# Altium PCB carte_pami26.PcbDoc
Units mm, origin at the board's own origin, x right, y up, seen from the top; angles counter-clockwise.
Board outline 78.9 x 53.9 mm, 2 copper layers (Top Layer, Bottom Layer); 38 components, 32 nets, 130 pads, 0 vias.
Unrouted connection lines stored in the file: 82.
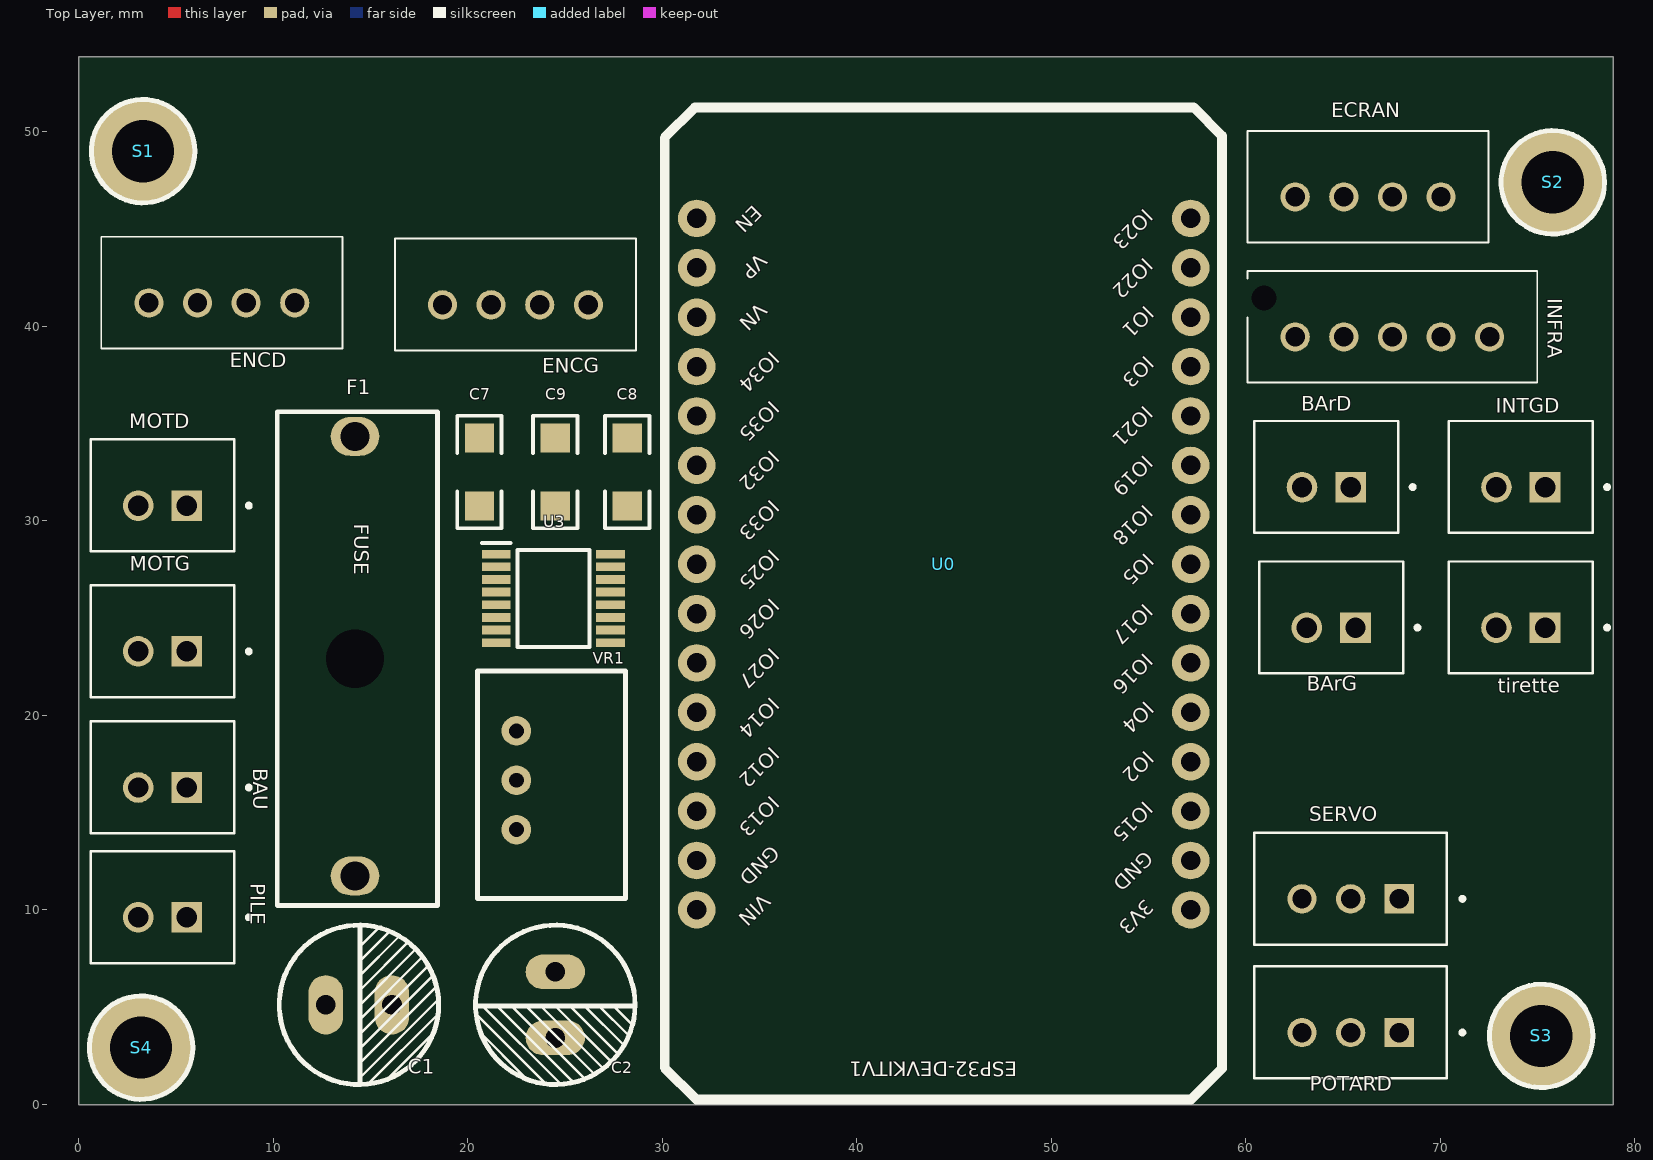
[diagram p0: Top Layer view]
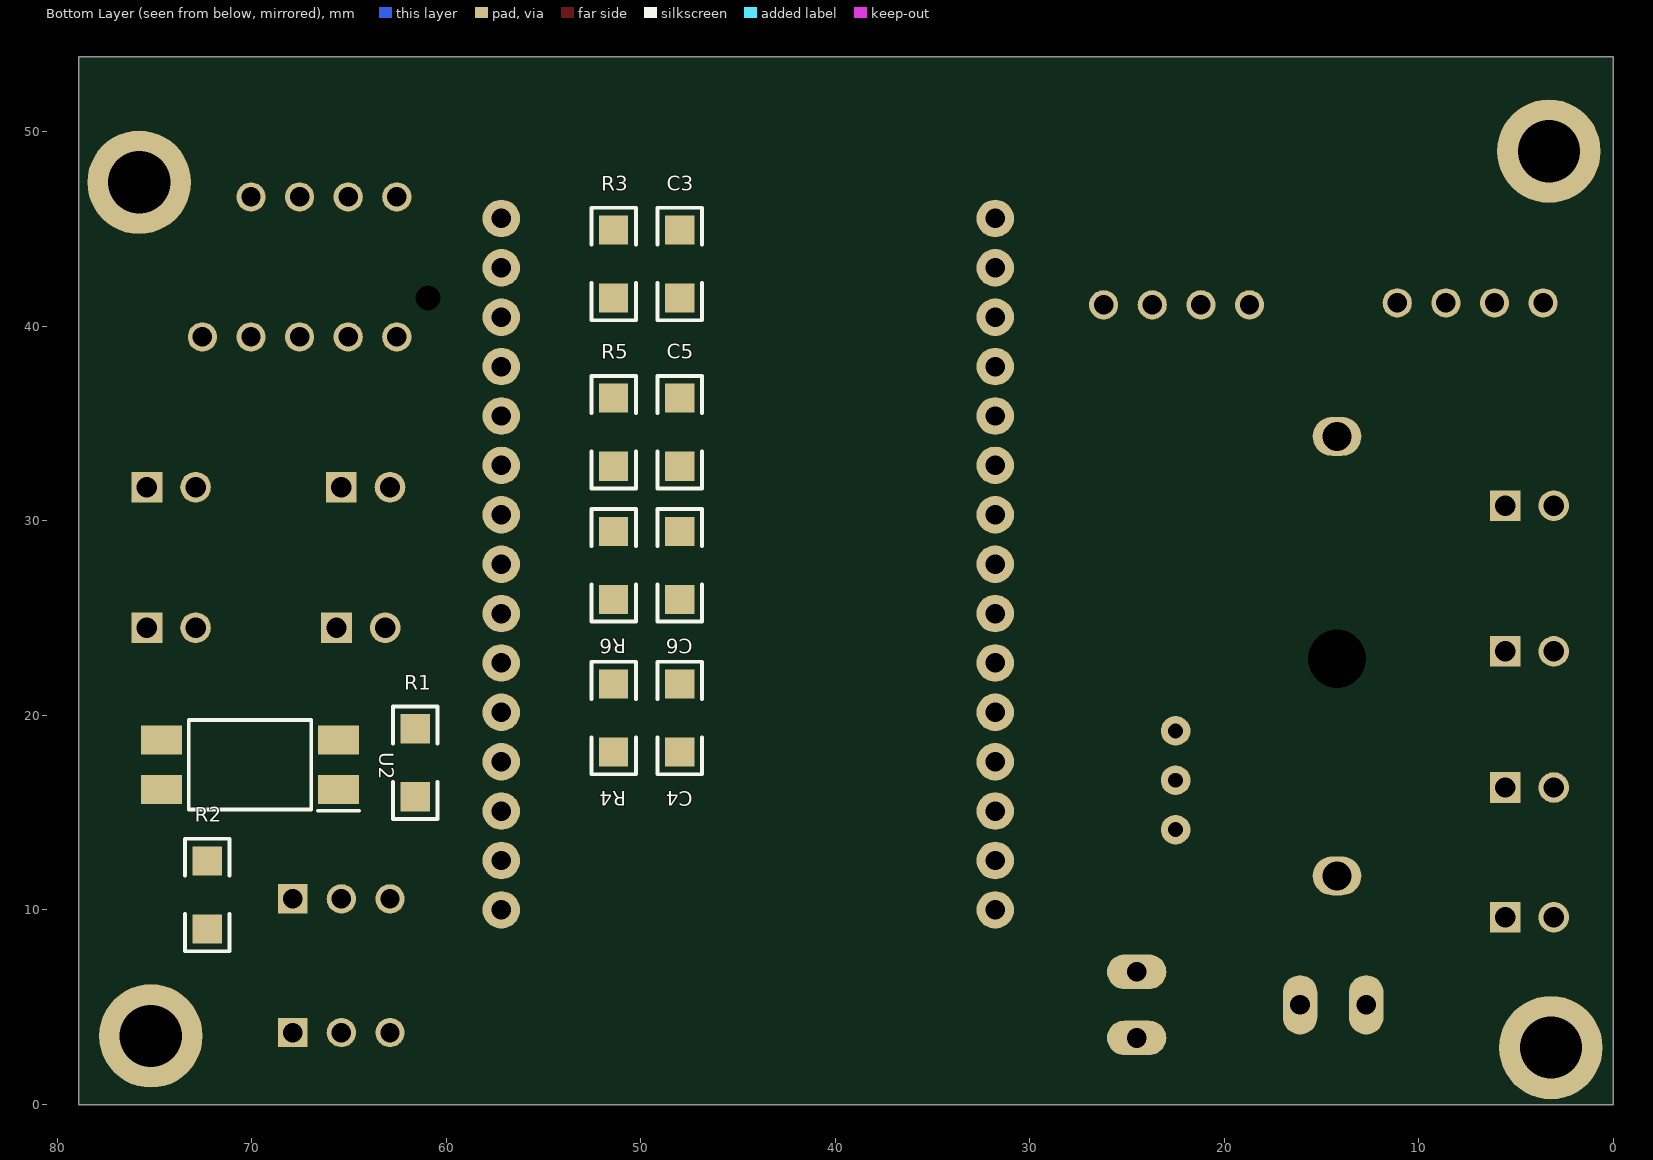
[diagram p1: Bottom Layer view, seen from below]

## Layer stack, top to bottom
Top Solder: solder mask 0.0102, Solder Resist, Dk 3.5
Top Layer: signal copper 0.0356
Dielectric 1: dielectric 0.32, FR-4, Dk 4.8
Bottom Layer: signal copper 0.0356
Bottom Solder: solder mask 0.0102, Solder Resist, Dk 3.5

## Board outline
0,-0.05 78.9,-0.05 78.9,53.85 0,53.85

## Design rules (kind name [scope] priority, off if disabled: settings)
Clearance [All] p1: gap=0.254 ignorepadtopadclearanceinfootprint=FALSE
PolygonConnect [All] p1: connectstyle=Relief reliefconductorwidth=0.254 reliefentries=4 polygonreliefangle="90 Angle" airgapwidth=0.254
RoutingVias [All] p1: holewidth=0.711 width=1.27 viastyle="Through Hole" minholewidth=0.711 minwidth=1.27 maxholewidth=0.711 maxwidth=1.27
SolderMaskExpansion [All] p1: expansion=0 istentingtop=FALSE
SupplyNets "Schematic Supply Nets_3" [InNet('3.3V')] p1: voltage=0.000
SupplyNets "Schematic Supply Nets_2" [InNet('5V')] p2: voltage=0.000
SupplyNets "Schematic Supply Nets_1" [InNet('GND')] p3: voltage=0.000
SupplyNets "Schematic Supply Nets" [InNet('V_Bat')] p4: voltage=0.000
Width [All] p1: maxlimit=0.254 minlimit=0.254 preferedwidth=0.254
30 further rules are at their usual default settings.

## Components (designator, comment, footprint, x,y, rotation, side; value= is the part's Value field where it differs from the comment)
BArD "Header 2H" JST_B2B-XH-A_(LF)(SN) 64.15,32.25 r0 top
BArG "Header 2H" JST_B2B-XH-A_(LF)(SN) 64.4,25.025 r0 top
BAU "Header 2H" JST_B2B-XH-A_(LF)(SN) 4.3,16.8 r0 top
C1 "35V" Condensateur 12.7,5.1 r0 top value=100uF
C2 "35V" Condensateur 24.5,6.8 r270 top value=100nF
C3 "Cap" "Capacitor 1206" 48,43.2 r90 bottom value=100nF
C4 "Cap" "Capacitor 1206" 48,19.85 r90 bottom value=100nF
C5 "Cap" "Capacitor 1206" 48,34.55 r270 bottom value=100nF
C6 "Cap" "Capacitor 1206" 48,27.7 r90 bottom value=100nF
C7 "Cap" "Capacitor 1206" 20.6,32.5 r90 top value=10uF
C8 "Cap" "Capacitor 1206" 28.2,32.5 r270 top value=10nF
C9 "Cap" "Capacitor 1206" 24.5,32.5 r270 top value=2.2uF
ECRAN "Header 4" B4BXHALFSN 62.55,46.65 r0 top
ENCD "Header 4" B4BXHALFSN 3.6,41.2 r0 top
ENCG "Header 4" B4BXHALFSN 18.7,41.1 r0 top
F1 "2A max" Fuse 14.2,34.33 r270 top
INFRA "Header 5H" B5BXHAMLFSN 62.55,39.45 r0 top
INTGD "Header 2H" JST_B2B-XH-A_(LF)(SN) 74.15,32.25 r0 top
MOTD "Header 2H" JST_B2B-XH-A_(LF)(SN) 4.3,31.3 r0 top
MOTG "Header 2H" JST_B2B-XH-A_(LF)(SN) 4.3,23.8 r0 top
PILE "Header 2H" JST_B2B-XH-A_(LF)(SN) 4.3,10.125 r0 top
POTARD "Header 3" JST_B3B-XH-A(LF)(SN) 65.4,4.2 r0 top
R1 "Res2" "Resistor 1206" 61.6,17.55 r270 bottom value=150
R2 "Res2" "Resistor 1206" 72.3,10.75 r90 bottom value=10K
R3 "Res2" "Resistor 1206" 51.4,43.2 r90 bottom value=10K
R4 "Res2" "Resistor 1206" 51.4,19.85 r90 bottom value=10K
R5 "Res2" "Resistor 1206" 51.4,34.55 r270 bottom value=10K
R6 "Res2" "Resistor 1206" 51.4,27.7 r90 bottom value=10K
S1 "Screw M3" "Screw M3" 3.3,49 r90 top
S2 "Screw M3" "Screw M3" 75.8,47.4 r90 top
S3 "Screw M3" "Screw M3" 75.2,3.5 r90 top
S4 "Screw M3" "Screw M3" 3.2,2.9 r90 top
SERVO "Header 3" JST_B3B-XH-A(LF)(SN) 65.4,11.075 r0 top
tirette "Header 2H" JST_B2B-XH-A_(LF)(SN) 74.15,25.025 r0 top
U0 "ESP32-DEVKITC-32D" MODULE_ESP32-DEVKITV1 44.476,24.983 r180 top
U2 "FOD817S" SOP254P1016X385-4N 70.1,17.45 r0 bottom
U3 "DRV8833PWPR" SOP65P640X120-16N 24.4,26 r0 top
VR1 "TSR 1-2450" TRS 22.5,19.19 r90 top

## Footprints (in the part's own frame and the unit in brackets; to place one, negate y for a bottom-side part, rotate by r counter-clockwise, add the part's x,y. Pads: shape width x height; smd on the part's side, far side on the other; paste and mask are expansions set on the pad)
B4BXHALFSN [mm]
  round 1.5 hole 1: 1(0,0) 2(2.5,0) 3(5,0) 4(7.5,0)
  silkscreen extent -2.45,-2.35 9.95,3.4, body extent -2.45,-2.35 9.95,3.4, height 7.52
B5BXHAMLFSN [mm]
  round 1.5 hole 1: 1(0,0) 2(2.5,0) 3(5,0) 4(7.5,0) 5(10,0)
  round 0.65 hole 1.3 unplated: MH1(-1.6,2)
  silkscreen extent -2.45,-2.35 12.45,3.4, body extent -2.45,-2.36 12.45,3.39, height 6.92
"Capacitor 1206" [mm]
  rect 1.5x1.5 smd: 1(-1.75,0) 2(1.75,0)
  silkscreen extent -2.89,-1.14 2.89,1.14, body extent -1.97,-0.99 1.97,0.96, height 1.3
Condensateur [mil]
  oval 70x120 hole 40: 1(0,0) 2(133.86,0)
  silkscreen extent -94,-161 228,161, body extent -93,-160 227,160, height 500
Fuse [mm] "Porte-fusible monté sur circuit 10 (UL) A, 6.3 (VDE) A, fusible Cartouche, 893-0574"
  round 2 hole 3: 0(11.43,0)
  oval 2x2.5 hole 1.5: 1(0,0) 2(22.6,0)
  silkscreen extent -1.27,-4 24.13,4.25, body extent -1.27,-4.29 24.13,4.29, height 11.41
JST_B2B-XH-A_(LF)(SN) [mm]
  rect 1.575x1.575 / inner round 1.575 / far side rect 1.575x1.575 hole 1.05: 1(1.25,-0.525)
  round 1.575 hole 1.05: 2(-1.25,-0.525)
  silkscreen extent -3.7,-2.88 4.54,2.88, body extent -3.7,-2.88 3.7,2.88, height 7
JST_B3B-XH-A(LF)(SN) [mm]
  rect 1.508x1.508 / inner round 1.508 / far side rect 1.508x1.508 hole 1: 1(2.5,-0.525)
  round 1.508 hole 1: 2(0,-0.525) 3(-2.5,-0.525)
  silkscreen extent -4.95,-2.88 5.85,2.88, body extent -4.95,-2.88 4.95,2.88, height 7
MODULE_ESP32-DEVKITV1 [mm]
  round 1.93 / inner round 1.524 / far side round 1.93 hole 1: 1(-12.7,15) 2(-12.7,12.46) 3(-12.7,9.92) 4(-12.7,7.38) 5(-12.7,4.84) 6(-12.7,2.3) 7(-12.7,-0.24) 8(-12.7,-2.78) 9(-12.7,-5.32) 10(-12.7,-7.86) 11(-12.7,-10.4) 12(-12.7,-12.94) 13(-12.7,-15.48) 14(-12.7,-18.02) 15(-12.7,-20.56) 16(12.7,-20.56) 17(12.7,-18.02) 18(12.7,-15.48) 19(12.7,-12.94) 20(12.7,-10.4) 21(12.7,-7.86) 22(12.7,-5.32) 23(12.7,-2.78) 24(12.7,-0.24) 25(12.7,2.3) 26(12.7,4.84) 27(12.7,7.38) 28(12.7,9.92) 29(12.7,12.46) 30(12.7,15)
  silkscreen extent -14.31,-26.26 14.35,24.75, body extent -14.22,-26.09 14.28,24.84, height 7.2
"Resistor 1206" [mm]
  rect 1.5x1.5 smd: 1(-1.75,0) 2(1.75,0)
  silkscreen extent -2.89,-1.14 2.89,1.14, body extent -1.98,-0.95 1.98,0.93, height 0.55
"Screw M3" [mm] "M3 iso Screw"
  round 5.32 hole 3.2 unplated: 0(0,0)
  silkscreen extent -2.66,-2.66 2.66,2.66
SOP65P640X120-16N [mm]
  rect 1.475x0.45 smd: 1(-2.938,2.275) 2(-2.938,1.625) 3(-2.938,0.975) 4(-2.938,0.325) 5(-2.938,-0.325) 6(-2.938,-0.975) 7(-2.938,-1.625) 8(-2.938,-2.275) 9(2.938,-2.275) 10(2.938,-1.625) 11(2.938,-0.975) 12(2.938,-0.325) 13(2.938,0.325) 14(2.938,0.975) 15(2.938,1.625) 16(2.938,2.275)
  silkscreen extent -3.67,-2.5 1.85,2.85, body extent -3.2,-2.5 3.2,2.5, height 1.13
SOP254P1016X385-4N [mm]
  rect 2.1x1.5 smd: 1(-4.55,1.27) 2(-4.55,-1.27) 3(4.55,-1.27) 4(4.55,1.27)
  silkscreen extent -5.6,-2.3 3.15,2.37, body extent -5.08,-2.3 5.08,2.3, height 3.85
TRS [mil]
  round 60 hole 30: 1(0,0) 2(-100,0) 3(-200,0)
  silkscreen extent -340,-220 121,79, body extent -341,-218 120,80, height 398

## Part data
BArD BArG BAU INTGD MOTD MOTG PILE tirette: "Header, 2-Pin, Right Angle", LatestRevisionDate=17-Jul-2002, LatestRevisionNote="Re-released for DXP Platform.", Publisher="Altium Limited"
C1 C2: library part "Cap Pol1", "Polarized Capacitor (Radial)", LatestRevisionDate=17-Jul-2002, LatestRevisionNote="Re-released for DXP Platform.", PackageDescription="Polarized Capacitor (Radial); 2 Leads", PackageReference=RB7.6-15, Published=8-Jun-2000, Publisher="Altium Limited"
C3 C4 C5 C6 C7 C8 C9: "Capacitor", LatestRevisionDate=17-Jul-2002, LatestRevisionNote="Re-released for DXP Platform.", PackageDescription="Radial Cap, Thru-Hole; 2 Leads; 0.3 in Pin Spacing", PackageReference=RAD-0.3, Published=8-Jun-2000, Publisher="Altium Limited"
ECRAN ENCD ENCG: "Header, 4-Pin", LatestRevisionDate=17-Jul-2002, LatestRevisionNote="Re-released for DXP Platform.", Publisher="Altium Limited"
F1: library part "Fuse 2", "Main Fuse", LatestRevisionDate=17-Jul-2002, LatestRevisionNote="Re-released for DXP Platform.", PackageDescription="Thru-Hole; 2 Leads", PackageReference=PIN-W2/E2.8, Published=8-Jun-2000, Publisher="Altium Limited"
INFRA: "Header, 5-Pin, Right Angle", LatestRevisionDate=17-Jul-2002, LatestRevisionNote="Re-released for DXP Platform.", Publisher="Altium Limited"
POTARD SERVO: "Header, 3-Pin", LatestRevisionDate=17-Jul-2002, LatestRevisionNote="Re-released for DXP Platform.", Publisher="Altium Limited"
R1 R2 R3 R4 R5 R6: "Resistor", LatestRevisionDate=17-Jul-2002, LatestRevisionNote="Re-released for DXP Platform.", PackageDescription="Axial Device, Thru-Hole; 2 Leads; 0.4 in Pin Spacing", PackageReference=AXIAL-0.4, Published=8-Jun-2000, Publisher="Altium Limited"
U0: "Eval Board For Esp-Wroom-32", Package=None, Availability=Unavailable, MF="Espressif Systems", MP=ESP32-DEVKITC-32D, Price=None, SnapEDA_Link=https://www.snapeda.com/parts/ESP32-DEVKITC-32D/Espressif%20Systems/view-part/?ref=snap
U2: library part Optoisolator1, "4-Pin Phototransistor Optocoupler", DatasheetVersion=Nov-2003, LatestRevisionDate=04-Mar-2005, LatestRevisionNote="Sch pins 3 & 4 Swapped.", PackageReference=DIP-4, Published=24-Mar-1999, Publisher="Altium Limited"
U3: "Integrated Circuit", Manufacturer_Name="Texas Instruments", Mouser Part Number=595-DRV8833PWPR, Arrow Part Number=DRV8833PWPR, Arrow Price/Stock=https://www.arrow.com/en/products/drv8833pwpr/texas-instruments.html?utm_currency=USD&region=nac, Datasheet Link=http://www.ti.com/lit/gpn/drv8833, Height=1.2mm, Manufacturer_Part_Number=DRV8833PWPR, Mouser Price/Stock=https://www.mouser.co.uk/ProductDetail/Texas-Instruments/DRV8833PWPR?qs=luhu8ESwuKxT62RV9jrJTg%3D%3D
VR1: library part "Volt Reg", "Voltage Regulator", LatestRevisionDate=29-May-2009, LatestRevisionNote="IPC-7351 Footprint Added.", PackageDescription="3-Pin Transistor Outline Package 2.54 mm Pitch, 15.1 mm Lead Span", PackageReference=D2PAK, Published=24-Mar-1999, Publisher="Altium Limited"

## Nets (pads, with @x,y where several pads share a name; then routed paths per layer and width w, separated by ;. In a path a pad name is that pad's centre, name@x,y a point inside that pad or via, vN(x,y) a via of type N, cw(c..) or ccw(c..) an arc to the next point about the centre after c; other vN are vias at no path point)
3.3V: BArD.2 BArG.2 ENCD.1 ENCG.1 INFRA.3 INFRA.5 INTGD.2 POTARD.1 tirette.2 U0.1
5V: C2.1 C7.2 C8.1 ECRAN.3 SERVO.1 U0.30 U2.4 U3.1 U3.12 VR1.3
ED1: ENCD.3 U0.20
ED2: ENCD.2 U0.19
EG1: ENCG.3 U0.18
EG2: ENCG.2 U0.17
"enable MD": U0.28
"enable MG": U0.23
GND: C1.2 C2.2 C3.1 C4.1 C5.1 C6.1 C7.1 C9.1 ECRAN.4 ENCD.4 ENCG.4 INFRA.4 PILE.2 POTARD.3 R2.1 R3.1 R4.1 R5.1 R6.1 SERVO.3 U0.2 U0.29 U2.2 U3.3 U3.6 U3.13
MD+: MOTD.2 U3.2
MD-: MOTD.1 U3.4
MG+: MOTG.2 U3.7
MG-: MOTG.1 U3.5
NetBAU_2: BAU.2 F1.1
NetC8_2: C8.2 U3.11
NetC9_2: C9.2 U3.14
NetF1_2: F1.2 PILE.1
NetR1_2: R1.2 U2.1
"Sens1 MD": U0.25 U3.16
"Sens1 MG": U0.22 U3.9
"Sens2 MD": U0.24 U3.15
"Sens2 MG": U0.21 U3.10
servo_pwm: R2.2 SERVO.2 U2.3
T_Bump_ArD: BArD.1 C5.2 R5.2 U0.10
T_Bump_ArG: BArG.1 C6.2 R6.2 U0.9
T_I2C_SCL: ECRAN.1 INFRA.2 U0.14
T_I2C_SDA: ECRAN.2 INFRA.1 U0.11
T_potard: POTARD.2 U0.7
T_servo_pwm: R1.1 U0.5
T_switch_gd: C3.2 INTGD.1 R3.2 U0.15
T_tirette: C4.2 R4.2 tirette.1 U0.6
V_Bat: BAU.1 C1.1 VR1.1
pads on no net: F1.0 INFRA.MH1 S1.0 S2.0 S3.0 S4.0 U0.3 U0.4 U0.8 U0.12 U0.13 U0.16 U0.26 U0.27 U3.8 VR1.2

## Text inside footprints (layer, text, board x,y; h text height)
F1: Top Overlay "FUSE" at 13.914,29.836 h1.27 r270
U0: Top Overlay "EN" at 34.506,46.457 h1.27 r225; Top Overlay "VP" at 34.754,43.986 h1.27 r225; Top Overlay "VN" at 34.749,41.441 h1.27 r225; Top Overlay "IO34" at 35.39,38.931 h1.27 r225; Top Overlay "IO35" at 35.392,36.393 h1.27 r225; Top Overlay "IO32" at 35.392,33.853 h1.27 r225; Top Overlay "IO33" at 35.392,31.314 h1.27 r225; Top Overlay "IO25" at 35.392,28.773 h1.27 r225; Top Overlay "IO26" at 35.391,26.233 h1.27 r225; Top Overlay "IO27" at 35.39,23.692 h1.27 r225; Top Overlay "IO14" at 35.39,21.151 h1.27 r225; Top Overlay "IO12" at 35.392,18.613 h1.27 r225; Top Overlay "IO13" at 35.392,16.074 h1.27 r225; Top Overlay "GND" at 35.39,13.531 h1.27 r225; Top Overlay "VIN" at 34.95,11.032 h1.27 r225; Top Overlay "IO23" at 54.602,46.284 h1.27 r225; Top Overlay "IO22" at 54.601,43.743 h1.27 r225; Top Overlay "IO1" at 54.67,41.271 h1.27 r225; Top Overlay "IO3" at 54.657,38.719 h1.27 r225; Top Overlay "IO21" at 54.614,36.136 h1.27 r225; Top Overlay "IO19" at 54.603,33.584 h1.27 r225; Top Overlay "IO18" at 54.602,31.044 h1.27 r225; Top Overlay "IO5" at 54.657,28.558 h1.27 r225; Top Overlay "IO17" at 54.6,25.962 h1.27 r225; Top Overlay "IO16" at 54.601,23.423 h1.27 r225; Top Overlay "IO4" at 54.655,20.937 h1.27 r225; Top Overlay "IO2" at 54.657,18.398 h1.27 r225; Top Overlay "IO15" at 54.601,15.803 h1.27 r225; Top Overlay "GND" at 54.599,13.261 h1.27 r225; Top Overlay "3V3" at 54.638,10.759 h1.27 r225; Top Overlay "ESP32-DEVKITV1" at 48.256,2.421 h1.27 r180